# Altium PCB StairLed.PcbDoc
Units mm, origin at the board's own origin, x right, y up, seen from the top; angles counter-clockwise.
Board outline 123.06 x 88.14 mm, 2 copper layers (Top Layer, Bottom Layer); 183 components, 139 nets, 499 pads, 166 vias.
Unrouted connection lines stored in the file: 1.
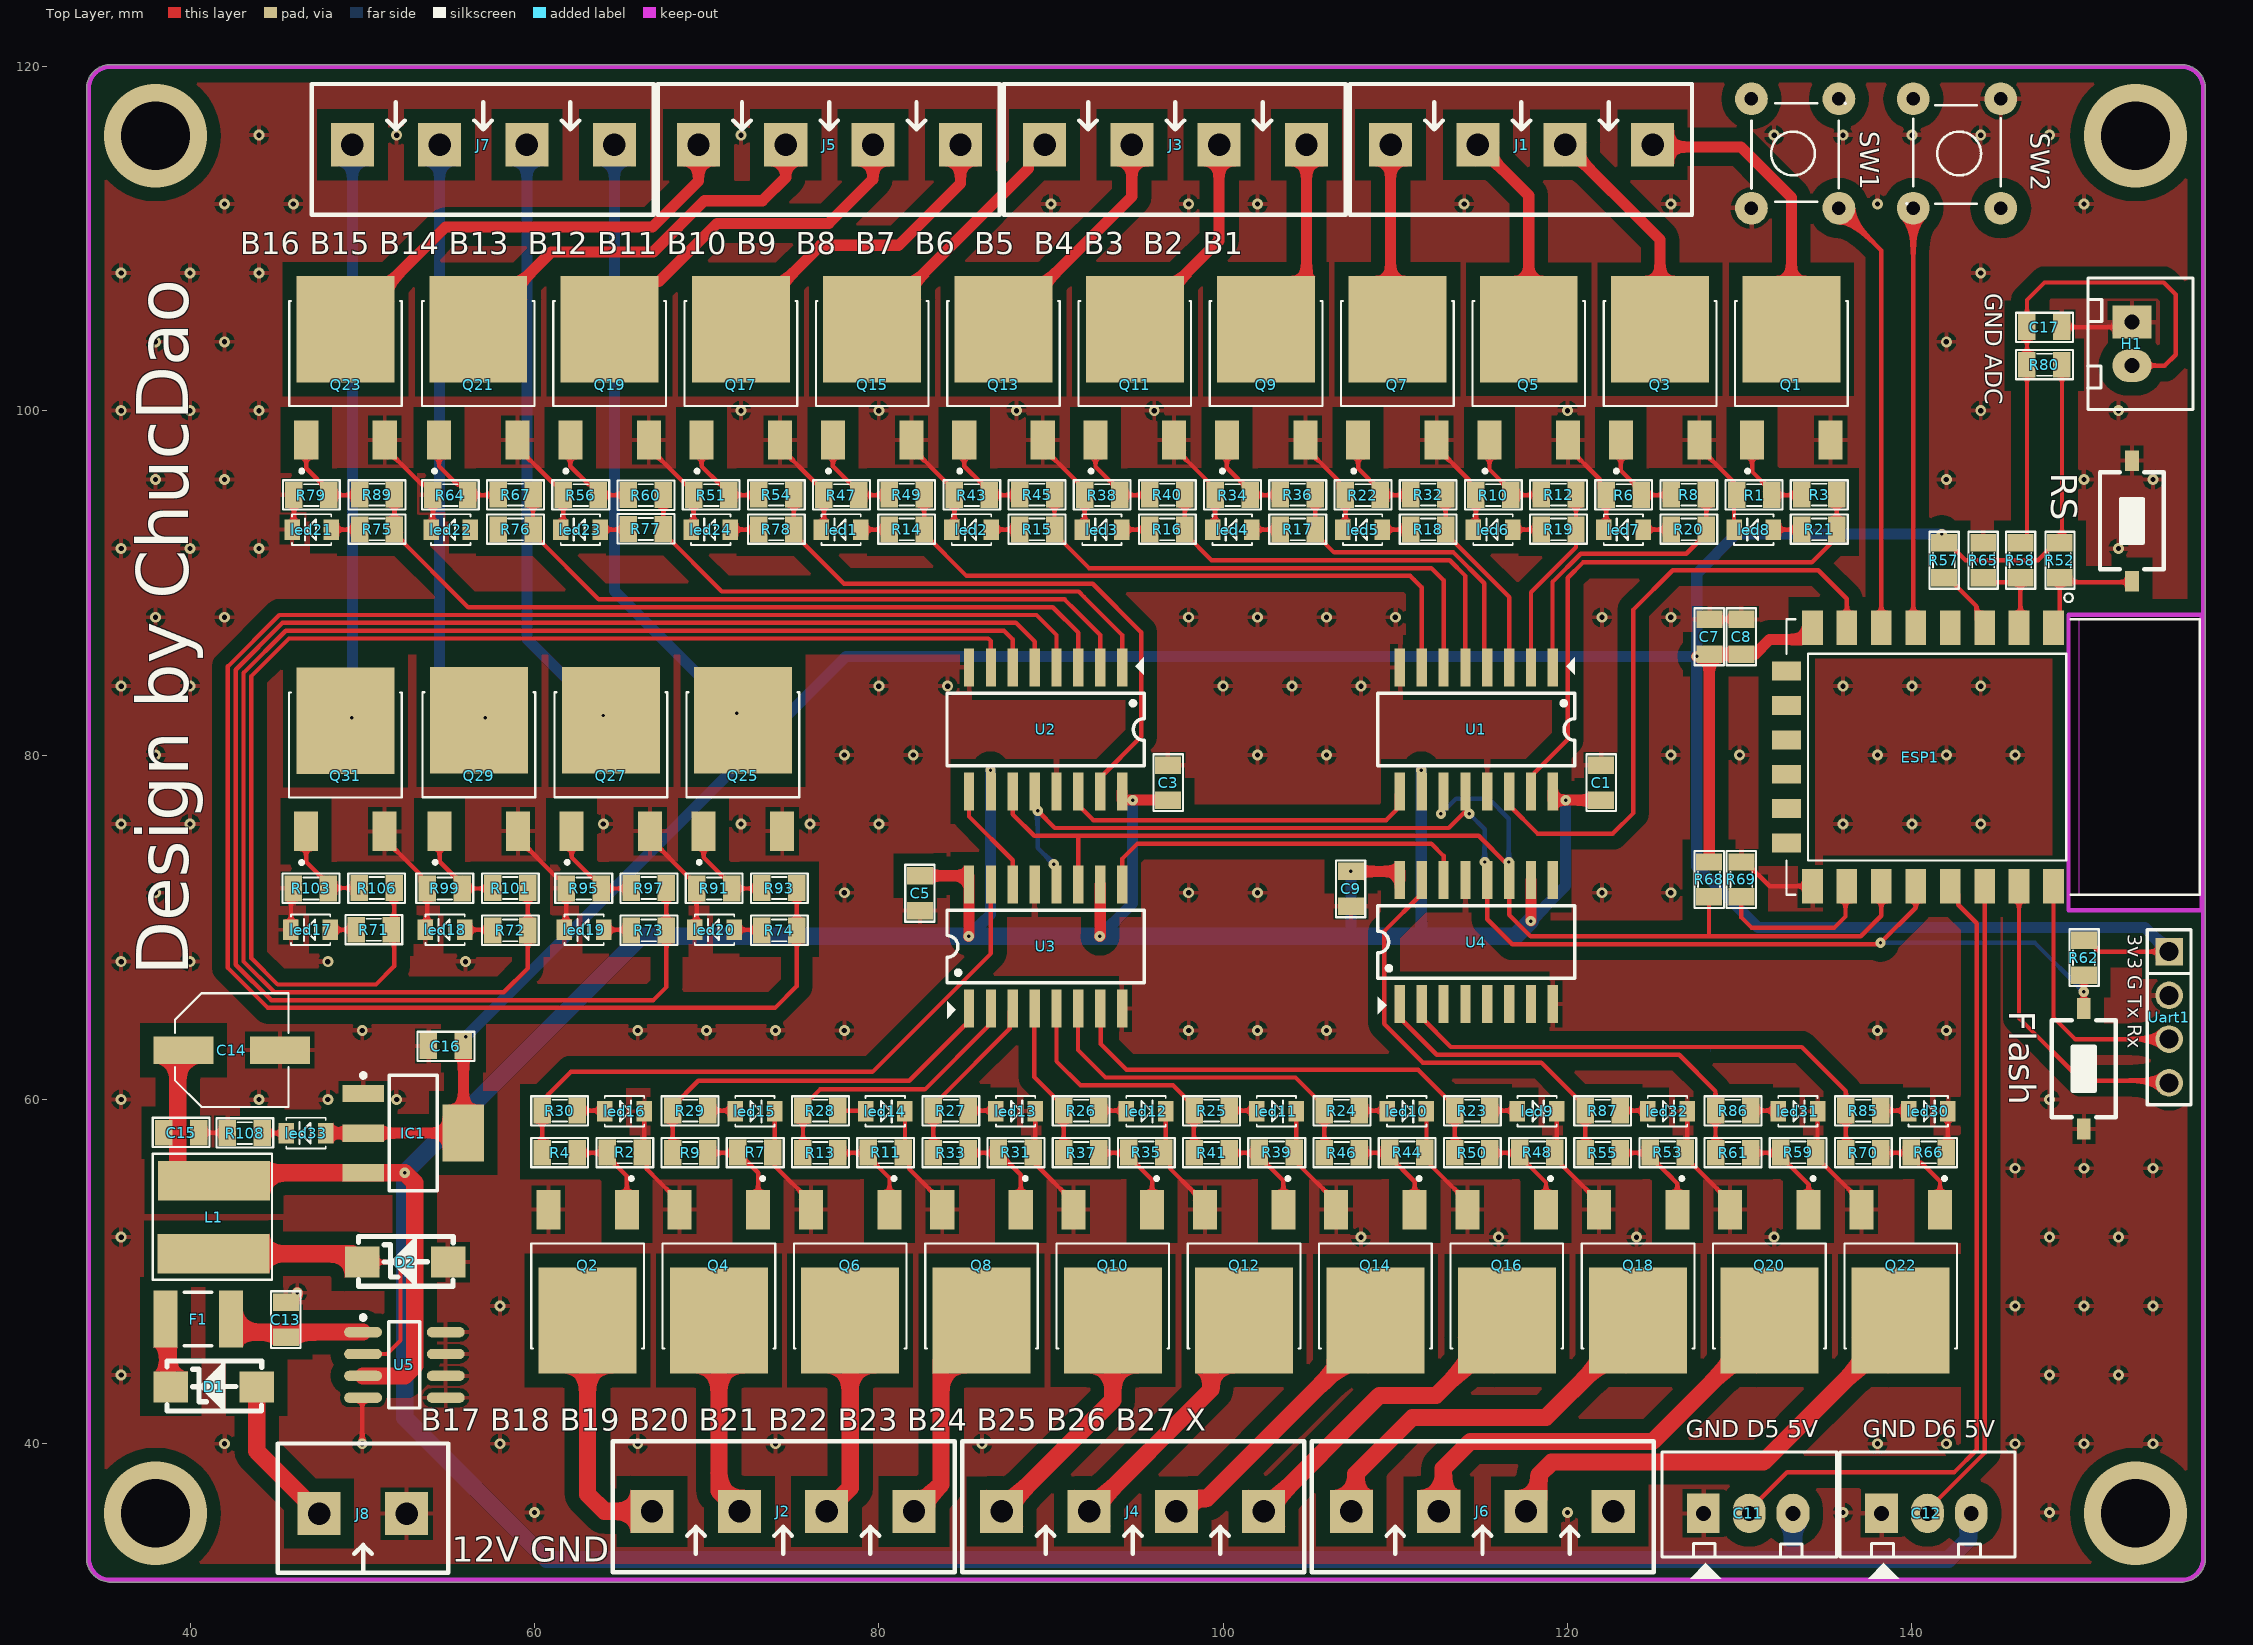
[diagram p0: Top Layer view]
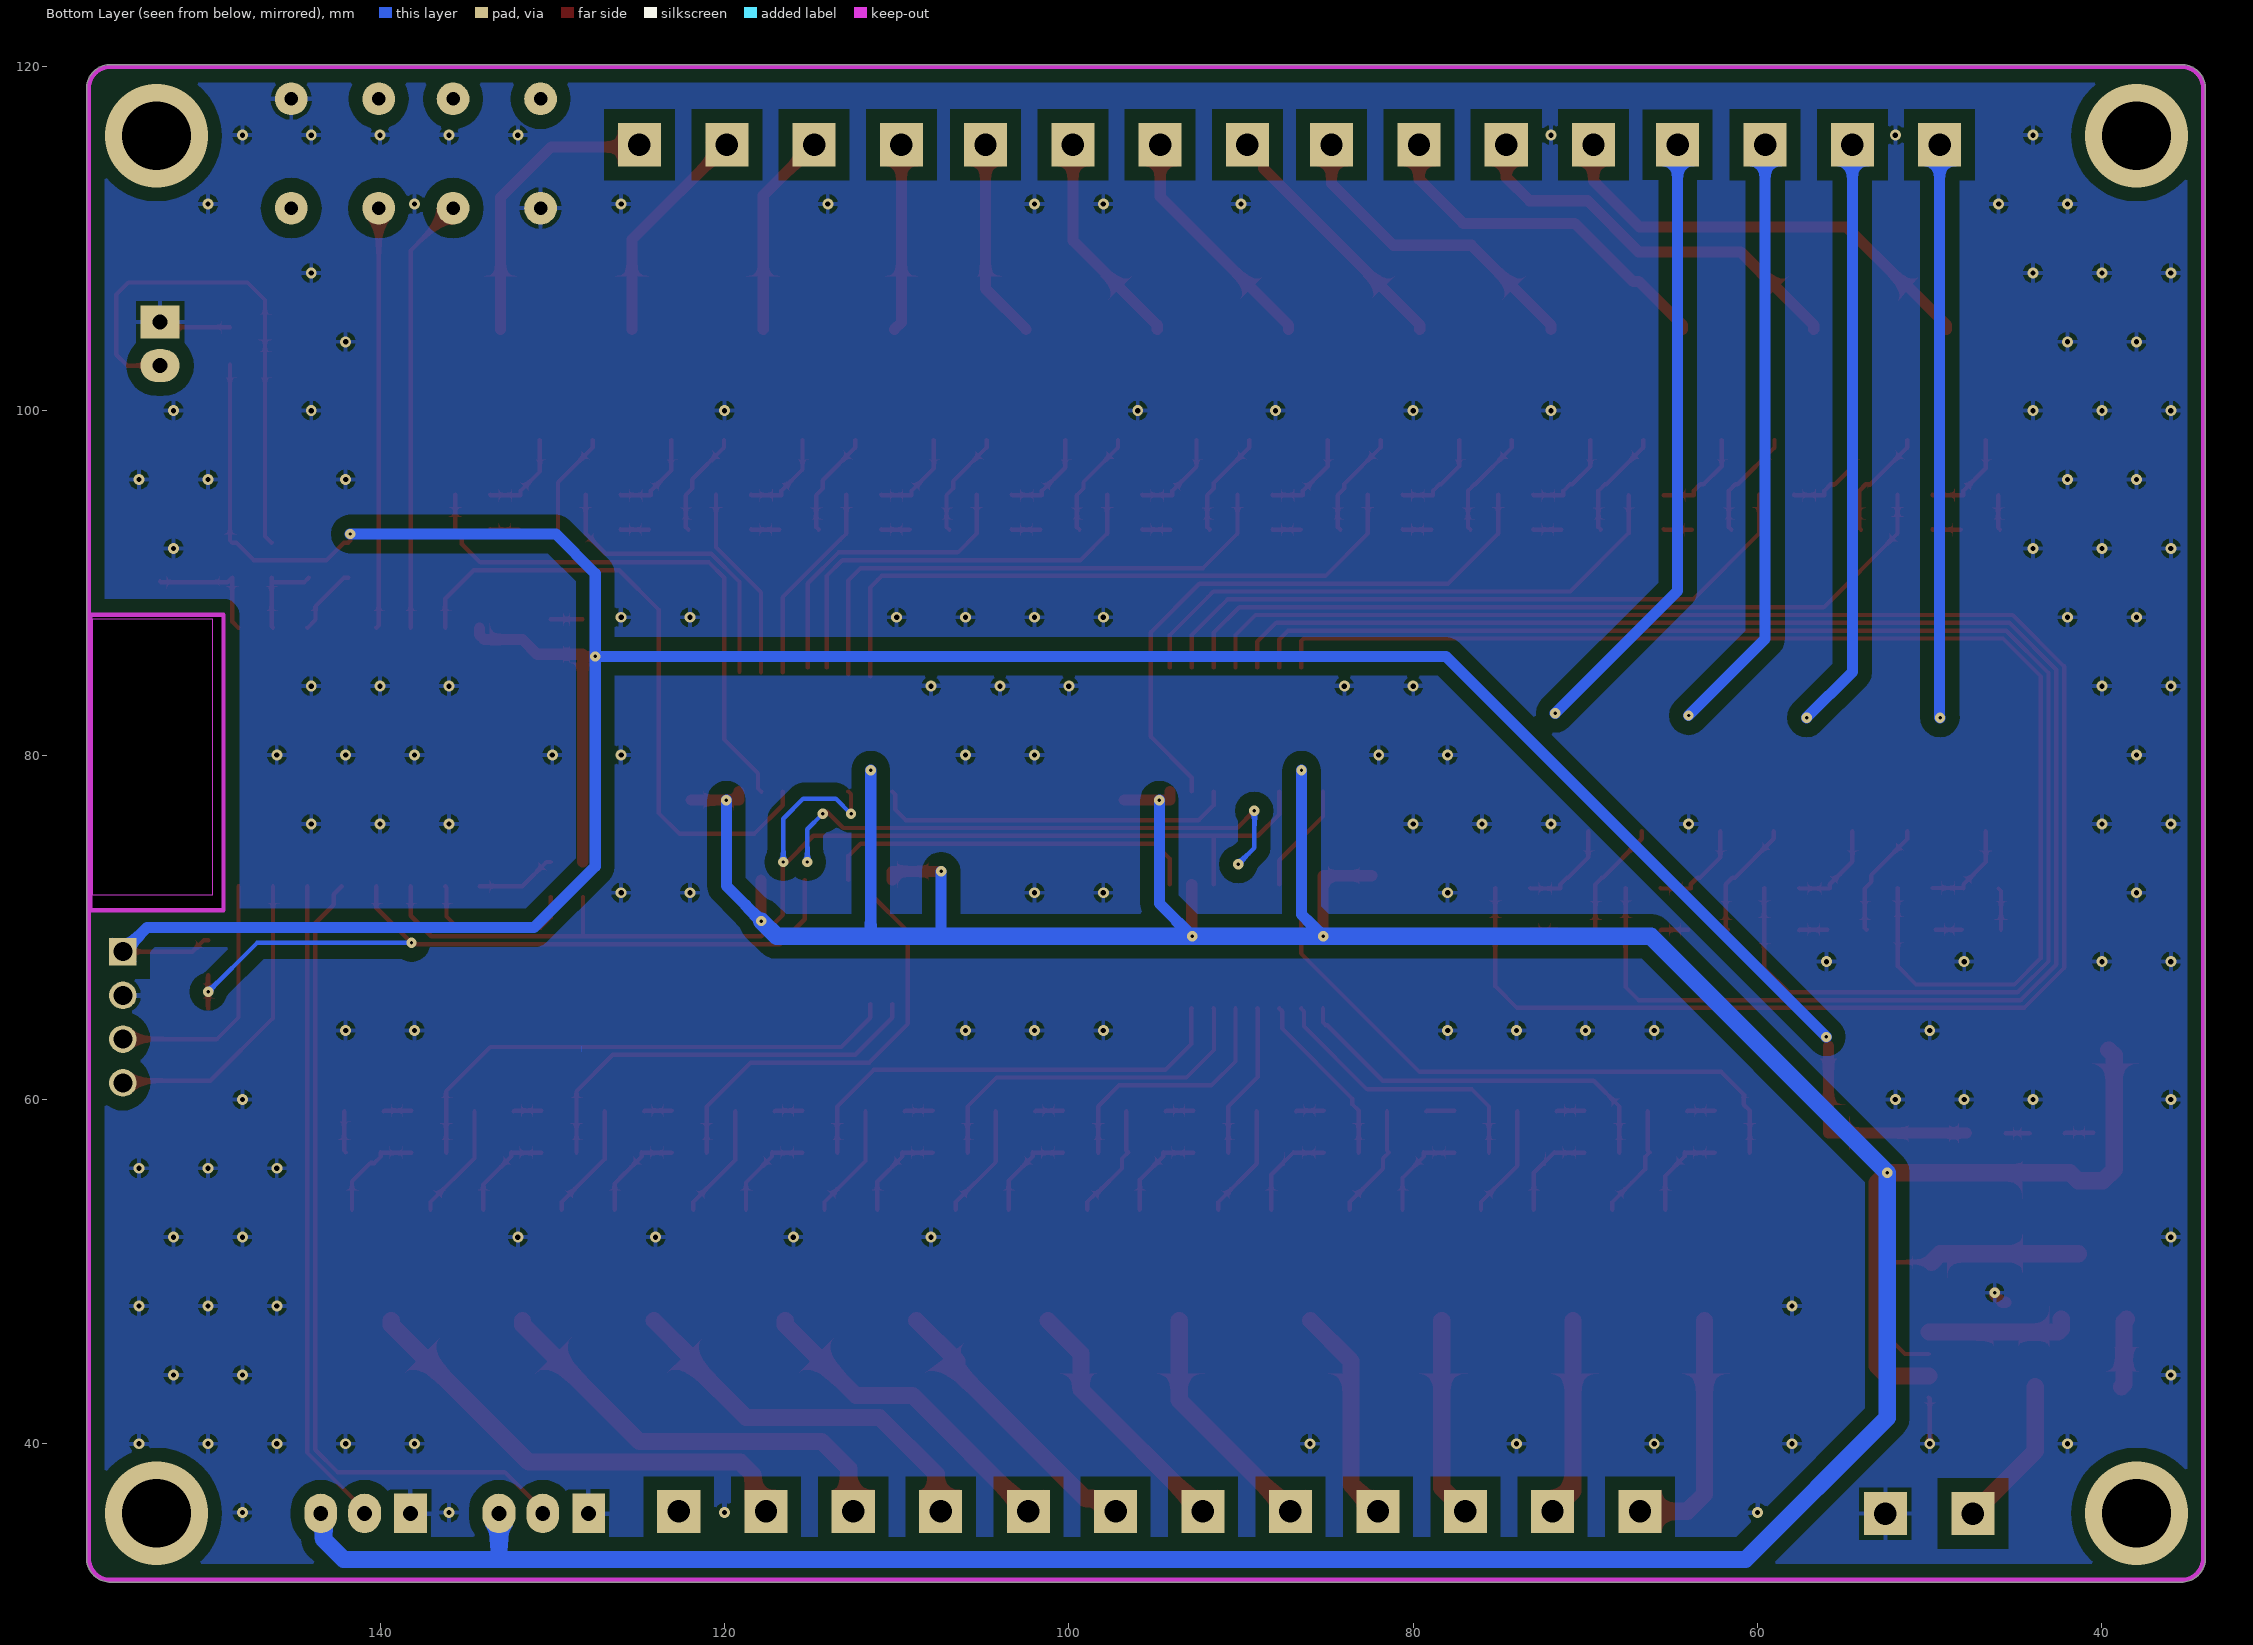
[diagram p1: Bottom Layer view, seen from below]
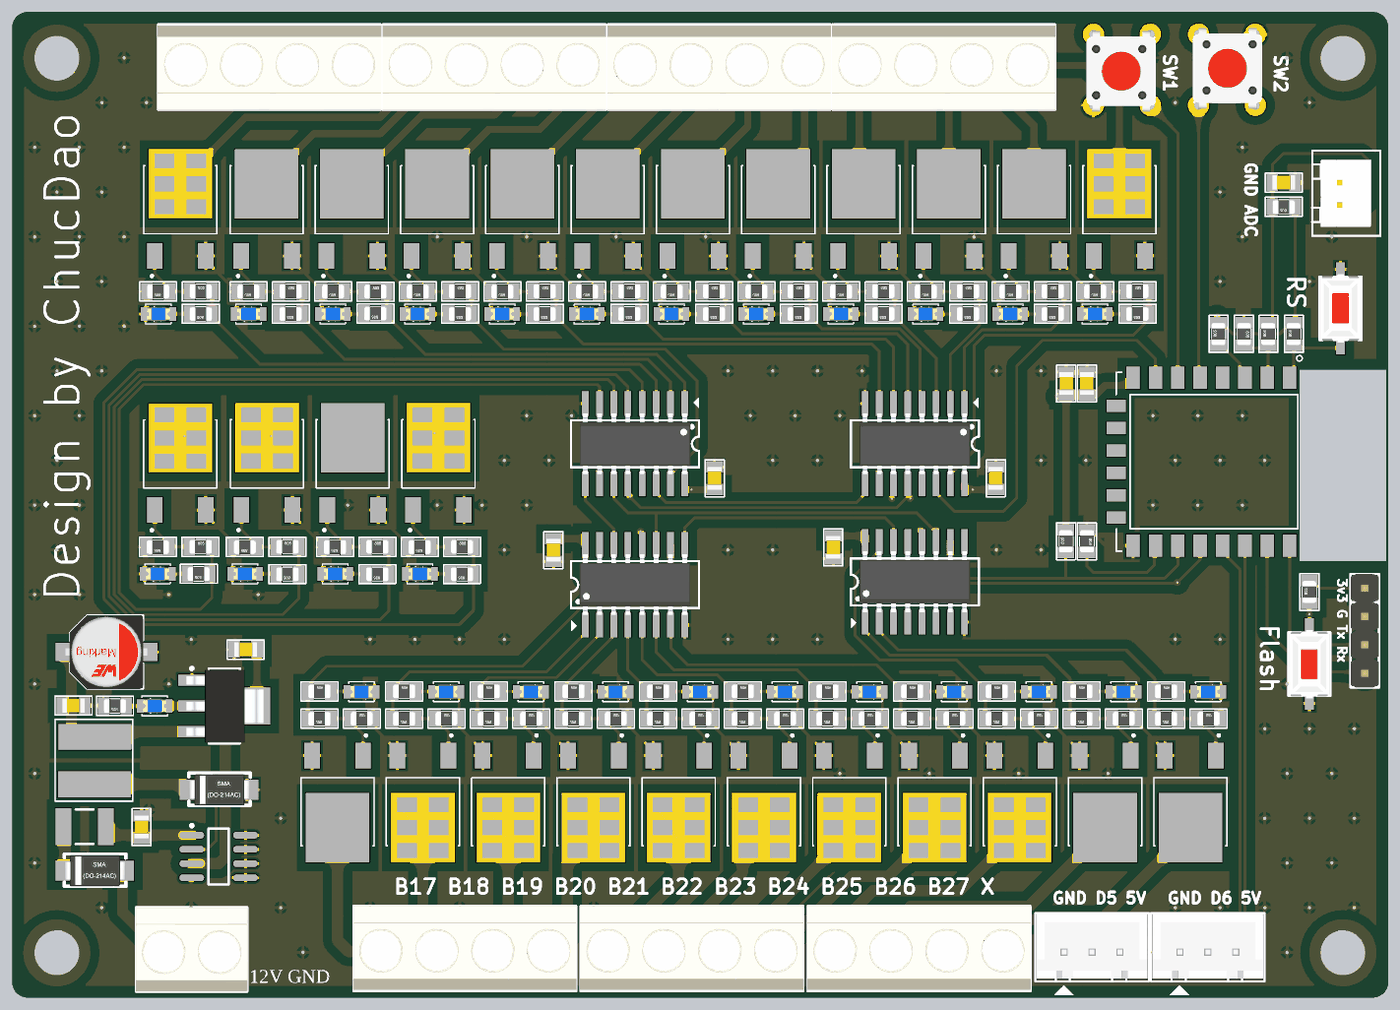
[diagram p2: 3D render of the assembled board from above, using the file's embedded part models]

## Layer stack, top to bottom
Top Solder: solder mask 0.0102, Solder Resist, Dk 3.5
Top Layer: signal copper 0.0356
Dielectric 1: dielectric 0.32, FR-4, Dk 4.8
Bottom Layer: signal copper 0.0356
Bottom Solder: solder mask 0.0102, Solder Resist, Dk 3.5

## Board outline
33.987,33.361 33.987,118.705 cw(c35.385,118.705) 35.385,120.102 155.654,120.102 cw(c155.654,118.705) 157.051,118.705 157.051,33.361 cw(c155.654,33.361) 155.654,31.964 35.385,31.964 cw(c35.385,33.361)
cut-out: 149.098,70.993 156.845,70.993 156.845,88.138 149.098,88.138

## Design rules (kind name [scope] priority, off if disabled: settings)
Clearance [All] p1: gap=0.8 ignorepadtopadclearanceinfootprint=FALSE
PolygonConnect [All] p1: connectstyle=Relief reliefconductorwidth=0.254 reliefentries=4 polygonreliefangle="90 Angle" airgapwidth=0.254
RoomDefinition StairLed [InComponentClass('StairLed')] p1: confinementstyle=ConfineIn formatcopy=TRUE lockcomponents=FALSE outline 0,0 50.8,0 50.8,25.4 0,25.4
RoutingVias [All] p1: holewidth=0.2 width=0.6 viastyle="Through Hole" minholewidth=0.2 minwidth=0.6 maxholewidth=0.2 maxwidth=0.6
SolderMaskExpansion [All] p1: expansion=0.102 istentingtop=FALSE
Width [All] p1: maxlimit=1 minlimit=0.254 preferedwidth=0.65
30 further rules are at their usual default settings.

## Components (designator, comment, footprint, x,y, rotation, side; value= is the part's Value field where it differs from the comment)
C1 "104" Cap-0805 121.92,78.396 r90 top
C3 "104" Cap-0805 96.774,78.396 r90 top
C5 "104" Cap-0805 82.423,71.972 r270 top
C7 "104" Cap-0805 128.27,86.868 r270 top value="22 pF"
C8 "104" Cap-0805 130.125,86.868 r270 top value="22 pF"
C9 "104" Cap-0805 107.442,72.226 r270 top
C11 "Header3" Header3 128.016,35.96 r0 top
C12 "Header3" Header3 138.367,35.96 r0 top
C13 "105" Cap-0805 45.593,47.207 r270 top value="22 pF"
C14 "220/16v" CAP-ALU-SMD-6.3x7.7x2.2 42.418,62.865 r0 top value=1000uF/16V
C15 "106" Cap-0805 39.481,58.039 r180 top value="22 pF"
C16 "104" Cap-0805 54.864,63.119 r0 top value="22 pF"
C17 "104" Cap-0805 147.701,104.877 r0 top
D1 "SS24" DO-214AC-Zenner 43.868,43.307 r180 top value=1N4007
D2 "SS24" DO-214AC-Zenner 54.991,50.546 r180 top value=1N4007
ESP1 "ESP8266-12E/ESP-12E" XCVR_ESP8266-12E/ESP-12E 141.224,79.883 r270 top
F1 "F1A" 1812 40.468,47.244 r180 top value=Fuse
Flash "SW" SW1-SMD 149.987,61.778 r90 top value="SW chip 2 pin"
H1 "Header 2P" "Header 2P-T" 152.908,103.911 r270 top
IC1 "LM1117" SOT223-4N 52.959,58.039 r0 top value=LM317
J1 "KF4" KF4-5.08 124.943,115.443 r180 top
J2 "KF4" KF4-5.08 66.827,36.074 r0 top
J3 "KF4" KF4-5.08 104.843,115.443 r180 top
J4 "KF4" KF4-5.08 87.135,36.074 r0 top
J5 "KF4" KF4-5.08 84.743,115.443 r180 top
J6 "KF4" KF4-5.08 107.442,36.074 r0 top
J7 "KF4" KF4-5.08 64.643,115.443 r180 top
J8 "KF2" KF2-5.08 50.038,35.941 r180 top
L1 "L68uH 2A" 5D28 41.284,53.086 r90 top
led1 "LED SMD" SM-LED-0805-Blue 78.956,93.091 r180 top
led2 "LED SMD" SM-LED-0805-Blue 86.528,93.091 r180 top
led3 "LED SMD" SM-LED-0805-Blue 94.099,93.091 r180 top
led4 "LED SMD" SM-LED-0805-Blue 101.671,93.091 r180 top
led5 "LED SMD" SM-LED-0805-Blue 109.242,93.091 r180 top
led6 "LED SMD" SM-LED-0805-Blue 116.814,93.091 r180 top
led7 "LED SMD" SM-LED-0805-Blue 124.386,93.091 r180 top
led8 "LED SMD" SM-LED-0805-Blue 131.957,93.091 r180 top
led9 "LED SMD" SM-LED-0805-Blue 117.092,59.309 r0 top
led10 "LED SMD" SM-LED-0805-Blue 109.521,59.309 r0 top
led11 "LED SMD" SM-LED-0805-Blue 101.949,59.309 r0 top
led12 "LED SMD" SM-LED-0805-Blue 94.377,59.309 r0 top
led13 "LED SMD" SM-LED-0805-Blue 86.806,59.309 r0 top
led14 "LED SMD" SM-LED-0805-Blue 79.234,59.309 r0 top
led15 "LED SMD" SM-LED-0805-Blue 71.663,59.309 r0 top
led16 "LED SMD" SM-LED-0805-Blue 64.091,59.309 r0 top
led17 "LED SMD" SM-LED-0805-Blue 48.145,69.85 r180 top
led18 "LED SMD" SM-LED-0805-Blue 55.954,69.85 r180 top
led19 "LED SMD" SM-LED-0805-Blue 64.028,69.85 r180 top
led20 "LED SMD" SM-LED-0805-Blue 71.6,69.85 r180 top
led21 "LED SMD" SM-LED-0805-Blue 48.207,93.091 r180 top
led22 "LED SMD" SM-LED-0805-Blue 56.281,93.091 r180 top
led23 "LED SMD" SM-LED-0805-Blue 63.813,93.091 r180 top
led24 "LED SMD" SM-LED-0805-Blue 71.384,93.091 r180 top
led30 "LED SMD" SM-LED-0805-Blue 139.807,59.309 r0 top
led31 "LED SMD" SM-LED-0805-Blue 132.235,59.309 r0 top
led32 "LED SMD" SM-LED-0805-Blue 124.664,59.309 r0 top
led33 "LED SMD" SM-LED-0805-Blue 47.879,58.039 r180 top
Q1 "FDD8870" TRANS_SQD50N03-06P-GE3#1 133.001,102.489 r90 top
Q2 "FDD8870" TRANS_SQD50N03-06P-GE3#2 63.087,49.403 r270 top
Q3 "FDD8870" TRANS_SQD50N03-06P-GE3#2 125.375,102.489 r90 top
Q4 "FDD8870" TRANS_SQD50N03-06P-GE3#1 70.713,49.403 r270 top
Q5 "FDD8870" TRANS_SQD50N03-06P-GE3#2 117.748,102.489 r90 top
Q6 "FDD8870" TRANS_SQD50N03-06P-GE3#1 78.34,49.403 r270 top
Q7 "FDD8870" TRANS_SQD50N03-06P-GE3#2 110.122,102.489 r90 top
Q8 "FDD8870" TRANS_SQD50N03-06P-GE3#1 85.966,49.403 r270 top
Q9 "FDD8870" TRANS_SQD50N03-06P-GE3#2 102.495,102.489 r90 top
Q10 "FDD8870" TRANS_SQD50N03-06P-GE3#1 93.593,49.403 r270 top
Q11 "FDD8870" TRANS_SQD50N03-06P-GE3#2 94.869,102.489 r90 top
Q12 "FDD8870" TRANS_SQD50N03-06P-GE3#1 101.219,49.403 r270 top
Q13 "FDD8870" TRANS_SQD50N03-06P-GE3#2 87.243,102.489 r90 top
Q14 "FDD8870" TRANS_SQD50N03-06P-GE3#1 108.845,49.403 r270 top
Q15 "FDD8870" TRANS_SQD50N03-06P-GE3#2 79.616,102.489 r90 top
Q16 "FDD8870" TRANS_SQD50N03-06P-GE3#1 116.472,49.403 r270 top
Q17 "FDD8870" TRANS_SQD50N03-06P-GE3#2 71.99,102.489 r90 top
Q18 "FDD8870" TRANS_SQD50N03-06P-GE3#1 124.098,49.403 r270 top
Q19 "FDD8870" TRANS_SQD50N03-06P-GE3#2 64.363,102.489 r90 top
Q20 "FDD8870" TRANS_SQD50N03-06P-GE3#2 131.725,49.403 r270 top
Q21 "FDD8870" TRANS_SQD50N03-06P-GE3#2 56.737,102.489 r90 top
Q22 "FDD8870" TRANS_SQD50N03-06P-GE3#2 139.351,49.403 r270 top
Q23 "FDD8870" TRANS_SQD50N03-06P-GE3#1 49.028,102.489 r90 top
Q25 "FDD8870" TRANS_SQD50N03-06P-GE3#1 72.11,79.769 r90 top
Q27 "FDD8870" TRANS_SQD50N03-06P-GE3#2 64.443,79.769 r90 top
Q29 "FDD8870" TRANS_SQD50N03-06P-GE3#1 56.775,79.769 r90 top
Q31 "FDD8870" TRANS_SQD50N03-06P-GE3#1 49.022,79.756 r90 top
R1 "10K" R0805 130.834,95.098 r180 top value=0805
R2 "10K" R0805 65.254,56.921 r0 top value=0805
R3 "10R" R0805 134.62,95.123 r0 top value=0805
R4 "10R" R0805 61.468,56.896 r180 top value=0805
R6 "10K" R0805 123.263,95.098 r180 top value=0805
R7 "10K" R0805 72.825,56.921 r0 top value=0805
R8 "10R" R0805 127.048,95.123 r0 top value=0805
R9 "10R" R0805 69.04,56.896 r180 top value=0805
R10 "10K" R0805 115.691,95.098 r180 top value=0805
R11 "10K" R0805 80.397,56.921 r0 top value=0805
R12 "10R" R0805 119.477,95.123 r0 top value=0805
R13 "10R" R0805 76.611,56.896 r180 top value=0805
R14 "1K" R0805 81.619,93.104 r180 top value=0805
R15 "1K" R0805 89.19,93.104 r180 top value=0805
R16 "1K" R0805 96.762,93.104 r180 top value=0805
R17 "1K" R0805 104.334,93.104 r180 top value=0805
R18 "1K" R0805 111.905,93.104 r180 top value=0805
R19 "1K" R0805 119.477,93.104 r180 top value=0805
R20 "1K" R0805 127.048,93.104 r180 top value=0805
R21 "1K" R0805 134.62,93.104 r180 top value=0805
R22 "10K" R0805 108.119,95.098 r180 top value=0805
R23 "1K" R0805 114.469,59.347 r0 top value=0805
R24 "1K" R0805 106.898,59.347 r0 top value=0805
R25 "1K" R0805 99.326,59.347 r0 top value=0805
R26 "1K" R0805 91.754,59.347 r0 top value=0805
R27 "1K" R0805 84.183,59.347 r0 top value=0805
R28 "1K" R0805 76.611,59.347 r0 top value=0805
R29 "1K" R0805 69.04,59.347 r0 top value=0805
R30 "1K" R0805 61.468,59.347 r0 top value=0805
R31 "10K" R0805 87.969,56.921 r0 top value=0805
R32 "10R" R0805 111.905,95.123 r0 top value=0805
R33 "10R" R0805 84.183,56.896 r180 top value=0805
R34 "10K" R0805 100.548,95.098 r180 top value=0805
R35 "10K" R0805 95.54,56.921 r0 top value=0805
R36 "10R" R0805 104.334,95.123 r0 top value=0805
R37 "10R" R0805 91.754,56.896 r180 top value=0805
R38 "10K" R0805 92.976,95.098 r180 top value=0805
R39 "10K" R0805 103.112,56.921 r0 top value=0805
R40 "10R" R0805 96.762,95.123 r0 top value=0805
R41 "10R" R0805 99.326,56.896 r180 top value=0805
R43 "10K" R0805 85.404,95.098 r180 top value=0805
R44 "10K" R0805 110.684,56.921 r0 top value=0805
R45 "10R" R0805 89.19,95.123 r0 top value=0805
R46 "10R" R0805 106.898,56.896 r180 top value=0805
R47 "10K" R0805 77.833,95.098 r180 top value=0805
R48 "10K" R0805 118.255,56.921 r0 top value=0805
R49 "10R" R0805 81.619,95.123 r0 top value=0805
R50 "10R" R0805 114.469,56.896 r180 top value=0805
R51 "10K" R0805 70.261,95.098 r180 top value=0805
R52 "10K" R0805 148.59,91.313 r90 top value=0805
R53 "10K" R0805 125.827,56.921 r0 top value=0805
R54 "10R" R0805 74.047,95.123 r0 top value=0805
R55 "10R" R0805 122.041,56.896 r180 top value=0805
R56 "10K" R0805 62.69,95.098 r180 top value=0805
R57 "10K" R0805 141.859,91.313 r90 top value=0805
R58 "2K2" R0805 146.304,91.313 r90 top value=0805
R59 "10K" R0805 133.398,56.921 r0 top value=0805
R60 "10R" R0805 66.475,95.098 r0 top value=0805
R61 "10R" R0805 129.613,56.896 r180 top value=0805
R62 "10K" R0805 149.987,68.235 r90 top value=0805
R64 "10K" R0805 55.118,95.098 r180 top value=0805
R65 "1K" R0805 144.145,91.313 r270 top value=0805
R66 "10K" R0805 140.97,56.921 r0 top value=0805
R67 "10R" R0805 58.904,95.123 r0 top value=0805
R68 "10K" R0805 128.219,72.771 r90 top value=0805
R69 "10K" R0805 130.1,72.771 r270 top value=0805
R70 "10R" R0805 137.184,56.896 r180 top value=0805
R71 "1K" R0805 50.673,69.85 r180 top value=0805
R72 "1K" R0805 58.604,69.812 r180 top value=0805
R73 "1K" R0805 66.651,69.812 r180 top value=0805
R74 "1K" R0805 74.222,69.812 r180 top value=0805
R75 "1K" R0805 50.857,93.104 r180 top value=0805
R76 "1K" R0805 58.904,93.104 r180 top value=0805
R77 "1K" R0805 66.475,93.129 r180 top value=0805
R78 "1K" R0805 74.047,93.104 r180 top value=0805
R79 "10K" R0805 47.044,95.098 r180 top value=0805
R80 "2.2K" Res-0805 147.701,102.616 r180 top
R85 "1K" R0805 137.184,59.347 r0 top value=0805
R86 "1K" R0805 129.613,59.347 r0 top value=0805
R87 "1K" R0805 122.041,59.347 r0 top value=0805
R89 "10R" R0805 50.857,95.123 r0 top value=0805
R91 "10K" R0805 70.437,72.25 r180 top value=0805
R93 "10R" R0805 74.222,72.276 r0 top value=0805
R95 "10K" R0805 62.865,72.25 r180 top value=0805
R97 "10R" R0805 66.651,72.276 r0 top value=0805
R99 "10K" R0805 54.791,72.25 r180 top value=0805
R101 "10R" R0805 58.604,72.276 r0 top value=0805
R103 "10K" R0805 47.022,72.25 r180 top value=0805
R106 "10R" R0805 50.835,72.276 r0 top value=0805
R108 "1K" R0805 43.18,58.039 r180 top value=0805
RS "SW" SW1-SMD 152.781,93.599 r270 top value="SW chip 2 pin"
SW1 "SW" SW2-DIP 130.683,111.76 r90 top value="Button chip 4 pin"
SW2 "SW" SW2-DIP 145.161,118.11 r270 top value="Button chip 4 pin"
U1 "74HC595" 74HC595 115.062,81.28 r180 top
U2 "74HC595" 74HC595 90.043,81.28 r180 top
U3 "74HC595" 74HC595 89.332,69.088 r0 top
U4 "74HC595" 74HC595 114.351,69.342 r0 top
U5 "XL1509" SO8_N 52.451,44.577 r0 top
Uart1 "Jump 4p" "Jump 4p" 154.889,64.821 r270 top

## Footprints (in the part's own frame and the unit in brackets; to place one, negate y for a bottom-side part, rotate by r counter-clockwise, add the part's x,y. Pads: shape width x height; smd on the part's side, far side on the other; paste and mask are expansions set on the pad)
5D28 [mm] "5D28"
  rect 2.3x6.5 smd: 1(-2.051,-0.076) 2(2.184,-0.102)
  silkscreen extent -3.56,-3.48 3.76,3.45
74HC595 [mm]
  rect 0.6x2.2 smd: 1(-4.089,-3.803) 2(-2.819,-3.803) 3(-1.549,-3.803) 4(-0.279,-3.803) 5(0.991,-3.803) 6(2.261,-3.803) 7(3.531,-3.803) 8(4.801,-3.803) 9(4.801,3.397) 10(3.531,3.397) 11(2.261,3.397) 12(0.991,3.397) 13(-0.279,3.397) 14(-1.549,3.397) 15(-2.819,3.397) 16(-4.089,3.397)
  silkscreen extent -5.37,-4.39 6.08,1.9, body extent -4.6,-3.2 5.3,2.8, height 1.51
1812 [mm] "Chip Capacitor, Body 4.5x3.2mm, IPC High Density"
  rect 1.4x3.3 smd: 1(-1.9,0) 2(1.9,0)
  silkscreen extent -0.8,-1.55 0.8,1.55, body extent -2.4,-1.7 2.4,1.7, height 1.4
Cap-0805 [mil]
  rect 40x59.06 smd: 1(-40,-1) 2(40,-1)
  silkscreen extent -65,-35 65,32, body extent -40,-26 40,24, height 24
CAP-ALU-SMD-6.3x7.7x2.2 [mm]
  rect 3.5x1.6 smd: 1(-2.8,0) 2(2.8,0)
  silkscreen extent -3.3,-3.3 3.3,3.3, body extent -3.65,-3.3 3.65,3.3, height 7.65
DO-214AC-Zenner [mm]
  rect 2x1.8 smd: 1(0,0) 2(5,0)
  silkscreen extent -0.29,-1.49 5.21,1.4, body extent -0.29,-1.4 5.21,1.4, height 2.6
Header3 [mil] "CON 3"
  rect 75x90 hole 34: 1(-5,0)
  oval 75x90 hole 34: 2(100,0) 3(200,0)
  silkscreen extent -100,-150 300,140, body extent -95,-90 295,136, height 276
"Header 2P-T" [mil]
  rect 75x90 hole 34: 1(-49,-5)
  oval 75x90 hole 34: 2(51,-5)
  silkscreen extent -149,-106 151,135, body extent -117,-75 119,102, height 236
"Jump 4p" [mm]
  rect 1.6x1.6 hole 1.1: 1(-3.759,0.051)
  round 1.6 hole 1.1: 2(-1.219,0.051) 3(1.321,0.051) 4(3.861,0.051)
  silkscreen extent -5.03,-1.22 5.13,1.32, body extent -5.03,-1.22 5.13,1.32, height 8.54
KF2-5.08 [mm]
  rect 2.5x2.5 hole 1.3: 1(-2.54,0) 2(2.54,0)
  silkscreen extent -4.95,-4.08 4.95,3.43, body extent -5,-4.07 5,3.43, height 10
KF4-5.08 [mm]
  rect 2.5x2.5 hole 1.3: 1(0,0) 2(5.08,0) 3(10.147,0) 4(15.215,0)
  silkscreen extent -2.29,-3.53 17.58,4.06, body extent -2.36,-3.43 17.64,4.07, height 10
R0805 [mil] "Chip Resistor, 2x1.2mm"
  rect 40x59.06 smd: 1(-40,0) 2(40,0)
  silkscreen extent -65,-34 65,33, body extent -39,-25 39,25, height 31
Res-0805 [mil]
  rect 40x59.06 smd: 1(-40,-2) 2(40,-2)
  silkscreen extent -65,-36 65,31, body extent -39,-27 39,23, height 31
SM-LED-0805-Blue [mm]
  rect 0.9x1.2 smd: 1(0,0) 2(2.286,0)
  silkscreen extent 0,-0.89 2.29,0.89, body extent 0.13,-0.62 2.15,0.63, height 1.1
SO8_N [mm] "SOIC, 8-Leads, Body 4.9x3.9mm, Pitch 1.27mm, IPC Medium Density"
  oval 2.2x0.6 smd: 1(-2.4,1.905) 2(-2.4,0.635) 3(-2.4,-0.635) 4(-2.4,-1.905) 5(2.4,-1.905) 6(2.4,-0.635) 7(2.4,0.635) 8(2.4,1.905)
  silkscreen extent -2.52,-2.5 0.9,2.88, body extent -1.95,-2.45 1.95,2.45, height 1.75
SOT223-4N [mm] "SOT223, 4-Leads, Body 6.5x3.5mm, Pitch 2.3mm, Lead Span 7mm, IPC Medium Density"
  rect 2.4x1 smd: 1(-2.9,2.3) 2(-2.9,0) 3(-2.9,-2.3)
  rect 2.4x3.3 smd: 4(2.9,0)
  silkscreen extent -3.02,-3.35 1.4,3.47, body extent -3.39,-3.27 3.5,3.23, height 1.72
SW1-SMD [mm]
  rect 1.2x0.8 smd: 1(-3.5,0) 2(3.5,0)
  silkscreen extent -2.82,-1.85 2.82,1.85, body extent -3.05,-1.85 3.05,1.85, height 2.5
SW2-DIP [mil] "SW button 4pin, 250 x250 mil"
  round 75 hole 31: 1(0,0) 2(0,-200) 3(250,-200) 4(250,0)
  silkscreen extent 15,-215 240,0, body extent -36,-220 276,24, height 276
TRANS_SQD50N03-06P-GE3#1 [mil]
  rect 90x55 smd: 1(-165,89.76) 3(-165,-89.76)
  rect 243.31x224.02 smd paste-157.48: 4(88.35,0)
  silkscreen extent -240,-129 152,129
TRANS_SQD50N03-06P-GE3#2 [mil]
  rect 90x55 smd: 1(-165,89.76) 3(-165,-89.76)
  rect 243.31x224.02 smd: 4(88.35,0)
  silkscreen extent -240,-129 152,129
XCVR_ESP8266-12E/ESP-12E [mm]
  rect 2x1.2 smd: 1(-7.5,7) 2(-7.5,5) 3(-7.5,3) 4(-7.5,1) 5(-7.5,-1) 6(-7.5,-3) 7(-7.5,-5) 8(-7.5,-7) 15(7.5,-7) 16(7.5,-5) 17(7.5,-3) 18(7.5,-1) 19(7.5,1) 20(7.5,3) 21(7.5,5) 22(7.5,7)
  rect 1.1x1.7 smd: 9(-5,-8.5) 10(-3,-8.5) 11(-1,-8.5) 12(1,-8.5) 13(3,-8.5) 14(5,-8.5)
  Keep-Out Layer region: 8,8.51 -8.009,8.51 -8.009,15.5 8,15.5
  Keep-Out Layer region: 8,8.51 -8.009,8.51 -8.009,15.5 8,15.5
  silkscreen extent -9.5,-8.5 8,15.5

## Part data
C1 C3 C5 C9 C17: library part Cap-0805
C7 C8 C13 C15 C16: library part Cap, "Capacitor", LatestRevisionDate=17-Jul-2002, LatestRevisionNote="Re-released for DXP Platform.", PackageReference=RAD-0.3, Published=8-Jun-2000, Publisher="Altium Limited", Ðon Giá=200
C11 C12: "Header IDC, 3 x 1 Pin Vertical 2.54mm Pitch (Non-Boxed, Male)", Manufacturer="W¨¹rth Elektronik eiSos GmbH", partNo=613002143121, ComponentLink1 Description=Manufacturer, ComponentLink1URL=http://www.we-online.com, ComponentLink2 Description=Datasheet, ComponentLink2URL=http://katalog.we-online.de/em/datasheet/6130xx143121.pdf, Created by="Karrer Zheng", Created Date="29 March 2013", NoPins=02
C14: library part CP4, "T? Nhôm 330uF 50V 10x10.5MM", Description 1="2200uF-3300uF/6,3V - 1000uF-2200uF/10V", Description 2="1000uF/16V - 470uF => 1000uF/25V - 100uF/100V", Description 3=330uF>470uF/35V_220uF>470uF/50V_10uF>22uF/250V, Description 4="220uF => 330uF/63V - 10uF =>33uF/160 - 200V", Description 5="4,7uF>10uF/250V_3,3uF>10uF/400V - 2,2uF>4,7uF/450V", Ðon Giá=4000
D1 D2: library part D1A, "Diode 1A"
ESP1: "This WiFi module has a 32-bit MCU micro and clock speeds supporting 80 MHz or 160 MHz. Supports the RTOS and integrated Wi-Fi MAC/BB/RF/PA/LNA, and has an on-board antenna.", Package=None, Availability=Unavailable, MF=AI-Thinker, MP=ESP8266-12E/ESP-12E, Price=None, SnapEDA_Link=https://www.snapeda.com/parts/ESP8266-12E/ESP-12E/AI-Thinker/view-part/106414/?ref=snap
F1: library part Fuse, "C?u chì t? ph?c h?i 1812 0.5A 30V MSMD050-30V", Designed by=VanDungEvn, Ðon Giá=3500
Flash RS: library part SW2, "Switch button 2 pin"
IC1: "AMS1117-3.3V SOT223", Ðon Giá=2500
J1 J2 J3 J4 J5 J6 J7: Manufacturer="W¨¹rth Elektronik eiSos GmbH", partNo=691133710004, ComponentLink1 Description=Manufacturer, ComponentLink1 URL=http://www.we-online.com, ComponentLink2 Description=Datasheet, ComponentLink2 URL=http://katalog.we-online.de/em/datasheet/6911337100xx.pdf, Created by="Baojun Chen", Created Date=4-Aug-15, NoPins=4
J8: Manufacturer="Würth Elektronik eiSos GmbH", partNo=691103110002, ComponentLink1 Description=Manufacturer, ComponentLink1URL=http://www.we-online.com, ComponentLink2 Description=Datasheet, ComponentLink2URL=http://katalog.we-online.de/em/datasheet/6911031100xx.pdf, Created by="Karrer Zheng", Created Date="29 October 2013", NoPins=2
L1: library part INDUCTOR, "Cu?n c?m dán CD74 68uH 7.4x7.4x4mm", Ðon Giá=1500
led1 led2 led3 led4 led5 led6 led7 led8 led9 led10 led11 led12 led13 led14 led15 led16 led17 led18 led19 led20 led21 led22 led23 led24 led30 led31 led32 led33: library part LED-SMD-0805
Q1 Q2 Q3 Q4 Q5 Q6 Q7 Q8 Q9 Q10 Q11 Q12 Q13 Q14 Q15 Q16 Q17 Q18 Q19 Q20 Q21 Q22 Q23 Q25 Q27 Q29 Q31: library part SQD50N03-06P-GE3, Package=None, Availability=Unavailable, MP=SQD50N03-06P-GE3, Price=None
R1 R2 R3 R4 R6 R7 R8 R9 R10 R11 R12 R13 R14 R15 R16 R17 R18 R19 R20 R21 R22 R23 R24 R25 R26 R27 R28 R29 R30 R31 R32 R33 R34 R35 R36 R37 R38 R39 R40 R41 R43 R44 R45 R46 R47 R48 R49 R50 R51 R53 R54 R55 R56 R58 R59 R60 R61 R64 R65 R66 R67 R70 R71 R72 R73 R74 R75 R76 R77 R78 R79 R85 R86 R87 R89 R91 R93 R95 R97 R99 R101 R103 R106 R108: library part RES_08, "Tr? 0805 1%", LatestRevisionDate=17-Jul-2002, LatestRevisionNote="Re-released for DXP Platform.", PackageReference=AXIAL-0.4, Published=8-Jun-2000, Publisher="Altium Limited", Ðon Giá=80
R52 R57 R62 R68 R69: library part RES_08, "RES_08", LatestRevisionDate=17-Jul-2002, LatestRevisionNote="Re-released for DXP Platform.", PackageReference=AXIAL-0.4, Published=8-Jun-2000, Publisher="Altium Limited"
R80: library part Res-0805
SW1 SW2: library part SW4, "Switch button 4 pin"
U5: "XL1509-5.0 SOP8 DC-DC 2A 5V"

## Via types
v1: diameter 0.635, hole 0.305, Top Layer to Bottom Layer, tented both sides, 137 vias
v2: diameter 0.6, hole 0.2, Top Layer to Bottom Layer, tented both sides, 25 vias
v3: diameter 6, hole 4, Top Layer to Bottom Layer, tented both sides, 4 vias

## Nets (pads, with @x,y where several pads share a name; then routed paths per layer and width w, separated by ;. In a path a pad name is that pad's centre, name@x,y a point inside that pad or via, vN(x,y) a via of type N, cw(c..) or ccw(c..) an arc to the next point about the centre after c; other vN are vias at no path point)
3.3V: C7.2 C8.2 C16.2 ESP1.8 IC1.2 IC1.4 led33.1 R52.2 R57.2 R62.2 R68.2 R80.1 Uart1.1 | length 198.8
  Top Layer w0.254: v2(141.732,92.837) 141.732,92.456 R57.2 142.101,92.329 143.117,91.313 147.332,91.313 148.348,92.329 R52.2 148.717,92.456 R80.1 ; R62.2 150.229,69.251 150.901,68.58 Uart1.1
  Top Layer w0.65: led33.1 IC1.2 IC1.4 55.88,58.06 C16.2 ; v2(127.508,85.725) 128.118,85.725 C7.2@128.232,85.839 ; R68.2 128.232,73.8 C7.2@128.232,85.839 ; ESP1.8 134.224,86.983 133.949,86.708 131.737,86.708 130.881,85.852 C8.2 C7.2 C7.2@128.232,85.839
  Bottom Layer w0.65: v2(56.007,63.627) 78.105,85.725 v2(127.508,85.725) ; v2(141.732,92.837) 129.794,92.837 127.508,90.551 v2(127.508,85.725) ; Uart1.1 153.546,69.974 131.067,69.974 127.508,73.533 v2(127.508,85.725)
+5V: C1.1 C3.1 C5.1 C9.1 C11.3 C12.3 C14.1 C15.2 IC1.3 L1.2 U1.10 U1.16 U2.10 U2.16 U3.10 U3.16 U4.10 U4.16 U5.3 | length 284.3
  Top Layer w0.254: v2(86.487,79.121) 86.487,77.909 U2.10 ; v2(111.506,79.121) 111.506,77.909 U1.10
  Top Layer w0.65: C5.1 85.217,72.988 85.242,72.963 U3.16 85.242,69.494 v2(85.217,69.469) ; v2(92.837,69.469) 92.862,69.494 U3.10 ; U2.16 94.132,77.405 94.157,77.38 v2(94.742,77.38) C3.1 ; v2(107.417,73.242) 110.236,73.242 110.261,73.217 U4.16 ; v2@117.873,70.375 117.881,70.383 U4.10 ; U1.16 119.151,77.405 119.176,77.38 v2(119.888,77.38) C1.1
  Top Layer w1: C14.1 39.589,62.865 39.289,62.565 39.289,55.92 39.939,55.27 L1.2 41.855,55.739 IC1.3 v2(52.465,55.739) 53.051,55.153 53.051,44.528 52.465,43.942 U5.3
  Bottom Layer w0.65: v2(85.217,69.469) 86.487,70.739 v2(86.487,79.121) ; v2(92.837,69.469) 94.742,71.374 v2(94.742,77.38) ; v2(107.417,73.242) 107.417,69.494 107.442,69.469 ; 111.506,69.469 v2(111.506,79.121) ; v2(117.856,70.358) 119.888,72.39 v2(119.888,77.38)
  Bottom Layer w1: v2(117.856,70.358) 116.967,69.469 111.506,69.469 107.442,69.469 v2(92.837,69.469) v2(85.217,69.469) 66.195,69.469 v2(52.465,55.739) 52.465,41.515 60.706,33.274 133.096,33.274 ; C11.3 133.096,33.274 ; C12.3 143.293,35.806 143.293,34.454 142.113,33.274 133.096,33.274
+12: D1.1 J8.2 | length 8.9
  Top Layer w1: D1.1 43.868,39.571 J8.2
A0: ESP1.2 R58.1 R65.2 | length 5.2
  Top Layer w0.254: R65.2 144.399,90.043 R58.1@146.304,90.043 ; ESP1.2 146.304,87.463 R58.1@146.304,90.043 ; R58.1 R58.1@146.304,90.043
ADC: C17.1 H1.2 R58.2 R80.2 | length 29.9
  Top Layer w0.254: R58.2 146.685,92.71 R80.2 C17.1 146.685,105.093 146.685,106.426 147.701,107.442 153.639,107.442 154.624,107.442 155.321,106.745 155.321,103.251 154.686,102.616 H1.2
CLK: ESP1.17 R68.1 U1.11 U2.11 U3.11 U4.11 | length 72.2
  Top Layer w0.254: U2.11 87.787,77.879 87.787,76.551 89.027,75.311 91.567,75.311 ; U3.11 91.592,75.286 91.567,75.311 ; v2(112.649,76.581) 112.649,77.731 U1.11 ; U4.11@116.475,73.676 114.839,75.311 91.567,75.311 ; U4.11@116.611,73.539 U4.11 116.611,70.714 117.856,69.469 128.143,69.469 ; R68.1 128.219,69.545 128.143,69.469 ; ESP1.17 138.224,70.66 137.033,69.469 128.143,69.469
  Bottom Layer w0.254: v2(112.649,76.581) 113.538,77.47 115.421,77.47 116.586,76.305 v2(116.586,73.787)
D0: ESP1.4
D1: C12.2 ESP1.20 | length 37.8
  Top Layer w0.254: C12.2 140.906,36.15 144.224,39.468 ESP1.20
D2: C11.2 ESP1.19 | length 48.2
  Top Layer w0.254: C11.2 130.556,36.15 132.76,38.354 142.468,38.354 143.77,39.656 143.77,70.225 142.697,71.298 142.697,71.91 ESP1.19
D3: ESP1.18 Flash.2 R62.1 U1.12 U2.12 U3.12 U4.12 | length 77.4
  Top Layer w0.254: v2(89.225,76.764) 90.224,75.765 113.103,75.765 114.046,76.708 114.173,76.708 v2(114.3,76.581) ; U4.12 115.341,70.46 116.786,69.015 138.009,69.015 138.016,69.022 138.11,69.022 140.224,71.136 ESP1.18 ; Flash.2 v2(149.987,66.249) R62.1
  Bottom Layer w0.254: v2(89.225,76.764) 89.225,74.605 v2(90.17,73.66) ; v2(114.3,76.581) 115.189,75.692 v2(115.189,73.787) ; v2(138.176,69.088) 147.148,69.088 v2(149.987,66.249)
D5: ESP1.5 SW2.3 | length 24.4
  Top Layer w0.254: SW2.3 140.081,87.526 ESP1.5
D6: ESP1.6 SW1.2 | length 25.4
  Top Layer w0.254: SW1.2 138.224,109.299 ESP1.6
D7: ESP1.7 U1.14 | length 36.7
  Top Layer w0.254: U1.14 116.611,77.083 118.257,75.438 122.629,75.438 123.825,76.634 123.825,88.446 126.111,90.732 134.566,90.732 136.224,89.074 ESP1.7
D8: ESP1.16 R69.2 | length 9.5
  Top Layer w0.254: R69.2 130.1,70.56 130.683,69.977 134.589,69.977 135.5,69.977 136.144,70.621 136.144,72.303 ESP1.16
EN: ESP1.3 R57.1 | length 4
  Top Layer w0.254: R57.1 142.101,90.297 143.751,88.647 143.751,87.856 ESP1.3
GND: C1.2 C3.2 C5.2 C7.1 C8.1 C9.2 C11.1 C12.1 C13.1 C14.2 C15.1 C16.1 C17.2 D2.1 ESP1.15 Flash.1 H1.1 IC1.1 J8.1 led1.2 led2.2 led3.2 led4.2 led5.2 led6.2 led7.2 led8.2 led9.2 led10.2 led11.2 led12.2 led13.2 led14.2 led15.2 led16.2 led17.2 led18.2 led19.2 led20.2 led21.2 led22.2 led23.2 led24.2 led30.2 led31.2 led32.2 Q1.3 Q2.3 Q3.3 Q4.3 Q5.3 Q6.3 Q7.3 Q8.3 Q9.3 Q10.3 Q11.3 Q12.3 Q13.3 Q14.3 Q15.3 Q16.3 Q17.3 Q18.3 Q19.3 Q20.3 Q21.3 Q22.3 Q23.3 Q25.3 Q27.3 Q29.3 Q31.3 R1.2 R2.2 R6.2 R7.2 R10.2 R11.2 R22.2 R31.2 R34.2 R35.2 R38.2 R39.2 R43.2 R44.2 R47.2 R48.2 R51.2 R53.2 R56.2 R59.2 R64.2 R65.1 R66.2 R69.1 R79.2 R91.2 R95.2 R99.2 R103.2 R108.2 RS.1 SW1.1 SW2.1 U1.8 U1.13 U2.8 U2.13 U3.8 U3.13 U4.8 U4.13 U5.4 U5.5 U5.6 U5.7 U5.8 Uart1.2 | length 180
  Top Layer w0.254: C15.1 42.139,58.064 R108.2 ; led17.2 45.859,72.103 R103.2 ; led21.2 46.028,93.198 R79.2 ; v1(50,40) 50,42.621 U5.4 ; Q31.3 51.302,75.12 53.394,73.028 53.394,72.631 R99.2 53.775,69.957 led18.2 ; Q23.3 51.308,97.853 53.441,95.721 53.721,95.721 54.102,95.34 R64.2 54.102,93.198 led22.2 ; Q21.3 59.017,97.853 61.15,95.721 61.293,95.721 61.674,95.34 R56.2 61.674,93.238 led23.2 ; Q29.3 59.055,75.133 61.315,72.873 61.468,72.873 61.849,72.492 R95.2 61.849,69.957 led19.2 ; led16.2 66.377,57.028 R2.2 66.533,56.658 66.533,55.939 67.272,55.2 68.433,54.038 Q4.3 ; Q19.3 66.643,97.853 68.776,95.721 68.864,95.721 69.245,95.34 R51.2 69.245,93.238 led24.2 ; Q27.3 66.723,75.133 68.983,72.873 69.04,72.873 69.421,72.492 R91.2 69.421,69.957 led20.2 ; led15.2 73.949,56.15 76.06,54.038 Q6.3 ; Q17.3 74.27,97.853 76.403,95.721 76.436,95.721 76.817,95.34 R47.2 76.817,93.238 led1.2 ; led14.2 81.52,57.028 R11.2 81.753,56.582 81.753,55.972 83.686,54.038 Q8.3 ; Q15.3 81.896,97.853 84.007,95.742 84.007,95.479 R43.2 84.388,93.238 led2.2 ; led13.2 89.092,56.259 91.313,54.038 Q10.3 ; Q13.3 89.523,97.853 91.579,95.797 91.579,95.479 R38.2 91.96,93.238 led3.2 ; led12.2 96.663,57.028 R35.2 96.916,56.562 96.916,55.992 98.298,54.61 98.367,54.61 98.939,54.038 Q12.3 ; Q11.3 97.149,97.853 99.151,95.852 99.151,95.479 R34.2 99.532,93.238 led4.2 ; led11.2 104.235,56.369 106.565,54.038 Q14.3 ; Q9.3 104.775,97.853 106.722,95.907 106.722,95.479 R22.2 107.103,93.238 led5.2 ; led10.2 111.807,56.424 114.192,54.038 Q16.3 ; Q7.3 112.402,97.853 114.294,95.961 114.294,95.479 R10.2 114.675,93.238 led6.2 ; led9.2 119.378,56.478 121.818,54.038 Q18.3 ; Q5.3 120.028,97.853 121.866,96.016 121.866,95.479 R6.2 122.247,93.238 led7.2 ; led32.2 126.95,56.533 129.445,54.038 Q20.3 ; Q3.3 127.655,97.853 129.671,95.837 led8.2 ; C7.1 C8.1 ; R69.1 130.342,73.787 131.746,72.383 ESP1.15 ; led31.2 134.521,56.588 137.071,54.038 Q22.3 ; R66.2 142.093,57.028 led30.2 ; C17.2 152.476,104.851 H1.1
  Top Layer w0.65: C13.1 45.81,48.223 46.228,48.641 v2(46.228,48.768)
  other v1: 60,36 120,36 136,36 148,36 42,40 58,40 66,40 74,40 86,40 138,40 142,40 146,40 150,40 154,40 36,44 148,44 152,44 58,48 146,48 150,48 154,48 36,52 108,52 116,52 124,52 132,52 148,52 152,52 146,56 150,56 154,56 36,60 44,60 48,60 52,60 148,60 50,64 66,64 70,64 74,64 78,64 98,64 102,64 106,64 138,64 142,64 36,68 40,68 48,68 56,68 38,72 78,72 98,72 102,72 122,72 126,72 36,76 40,76 64,76 72,76 76,76 80,76 136,76 140,76 144,76 38,80 78,80 82,80 102,80 106,80 126,80 130,80 138,80 142,80 146,80 36,84 40,84 80,84 84,84 100,84 104,84 108,84 136,84 140,84 144,84 38,88 42,88 98,88 102,88 106,88 110,88 122,88 126,88 36,92 40,92 44,92 152,92 38,96 42,96 142,96 150,96 154,96 36,100 40,100 44,100 72,100 80,100 88,100 96,100 120,100 144,100 152,100 38,104 42,104 142,104 36,108 40,108 44,108 144,108 42,112 46,112 90,112 98,112 102,112 114,112 126,112 138,112 150,112 44,116 52,116 72,116 132,116 136,116 140,116 144,116 148,116
NetC13_2: C13.2 F1.1 U5.1 | length 8.3
  Top Layer w1: F1.1 42.368,46.682 42.568,46.482 U5.1
NetD2_2: D2.2 L1.1 U5.2 | length 18
  Top Layer w0.254: D2.2@49.891,50.546 52.075,50.546 52.224,50.397 52.224,46.001 51.435,45.212 U5.2
  Top Layer w1: L1.1 49.402,51.035 D2.2@49.891,50.546
NetJ1_1: J1.1 Q1.4 | length 17
  Top Layer w0.65: J1.1 125.07,115.316 130.065,115.316 133.001,112.38 Q1.4
NetJ1_2: J1.2 Q3.4 | length 13
  Top Layer w0.65: J1.2 125.375,109.931 Q3.4
NetJ1_3: J1.3 Q5.4 | length 11.9
  Top Layer w0.65: J1.3 117.748,112.49 Q5.4
NetJ1_4: J1.4 Q7.4 | length 10.9
  Top Layer w0.65: J1.4 109.728,105.127 Q7.4
NetJ2_1: J2.1 Q2.4 | length 14.2
  Top Layer w1: Q2.4 63.087,37.064 64.077,36.074 J2.1
NetJ2_2: J2.2 Q4.4 | length 11.6
  Top Layer w1: Q4.4 70.713,37.268 J2.2
NetJ2_3: J2.3 Q6.4 | length 11.7
  Top Layer w1: J2.3 78.34,37.439 Q6.4
NetJ2_4: J2.4 Q8.4 | length 12.7
  Top Layer w1: J2.4 83.621,37.653 83.621,44.814 Q8.4
NetJ3_1: J3.1 Q9.4 | length 11.7
  Top Layer w0.65: Q9.4 104.843,107.08 J3.1
NetJ3_2: J3.2 Q11.4 | length 12.7
  Top Layer w0.65: Q11.4 94.869,104.978 99.763,109.872 J3.2
NetJ3_3: J3.3 Q13.4 | length 13.8
  Top Layer w0.65: Q13.4 87.243,104.978 94.695,112.431 J3.3
NetJ3_4: J3.4 Q15.4 | length 14.9
  Top Layer w0.65: Q15.4 79.616,104.978 88.703,114.065 88.703,114.518 J3.4
NetJ4_1: J4.1 Q10.4 | length 13.8
  Top Layer w1: J4.1 93.593,42.532 Q10.4
NetJ4_2: J4.2 Q12.4 | length 14.8
  Top Layer w1: J4.2 99.296,43.155 99.296,45.236 Q12.4
NetJ4_3: J4.3 Q14.4 | length 16.5
  Top Layer w1: J4.3 98.032,36.824 99.054,36.824 106.5,44.27 106.5,44.814 Q14.4
NetJ4_4: J4.4 Q16.4 | length 18.9
  Top Layer w1: J4.4 109.074,42.799 112.357,42.799 116.472,46.914 Q16.4
NetJ5_1: J5.1 Q17.4 | length 18.7
  Top Layer w0.65: Q17.4 71.99,104.978 76.613,109.601 81.153,109.601 84.743,113.191 J5.1
NetJ5_2: J5.2 Q19.4 | length 21
  Top Layer w0.65: Q19.4 64.363,104.978 66.883,107.498 67.229,107.498 70.602,110.871 77.089,110.871 79.663,113.445 J5.2
NetJ5_3: J5.3 Q21.4 | length 23.6
  Top Layer w0.65: Q21.4 56.737,104.978 60.979,109.22 66.9,109.22 69.874,112.194 73.25,112.194 74.596,113.54 J5.3
NetJ5_4: J5.4 Q23.4 | length 26.3
  Top Layer w0.65: Q23.4 49.028,104.978 51.548,107.498 51.657,107.498 54.829,110.67 66.855,110.67 69.528,113.343 J5.4
NetJ6_1: J6.1 Q18.4 | length 22.5
  Top Layer w1: J6.1 107.707,36.339 107.707,38.238 110.998,41.529 118.745,41.529 121.753,44.537 121.753,44.814 Q18.4
NetJ6_2: J6.2 Q20.4 | length 25.2
  Top Layer w1: J6.2 112.788,36.34 112.788,38.561 114.359,40.132 124.943,40.132 131.725,46.914 Q20.4
NetJ6_3: J6.3 Q22.4 | length 27.3
  Top Layer w1: J6.3 118.339,36.824 118.339,38.195 119.077,38.932 131.369,38.932 139.351,46.914 Q22.4
NetJ7_1: J7.1 Q25.4 | length 36
  Bottom Layer w0.65: J7.1 64.643,89.535 v2(71.755,82.423)
NetJ7_2: J7.2 Q27.4 | length 35
  Bottom Layer w0.65: J7.2 59.563,86.741 v2(64.008,82.296)
NetJ7_3: J7.3 Q29.4 | length 34.4
  Bottom Layer w0.65: J7.3 54.496,84.823 v2(57.15,82.169)
NetJ7_4: J7.4 Q31.4 | length 33.3
  Bottom Layer w0.65: v2(49.403,82.169) 49.428,82.194 J7.4
Netled1_1: led1.1 R14.2 | length 1.7
  Top Layer w0.254: led1.1 80.59,93.091 R14.2
Netled2_1: led2.1 R15.2 | length 1.7
  Top Layer w0.254: led2.1 88.162,93.091 R15.2
Netled3_1: led3.1 R16.2 | length 1.7
  Top Layer w0.254: led3.1 95.733,93.091 R16.2
Netled4_1: led4.1 R17.2 | length 1.7
  Top Layer w0.254: led4.1 103.305,93.091 R17.2
Netled5_1: led5.1 R18.2 | length 1.7
  Top Layer w0.254: led5.1 110.876,93.091 R18.2
Netled6_1: led6.1 R19.2 | length 1.7
  Top Layer w0.254: led6.1 118.448,93.091 R19.2
Netled7_1: led7.1 R20.2 | length 1.7
  Top Layer w0.254: led7.1 126.02,93.091 R20.2
Netled8_1: led8.1 R21.2 | length 1.7
  Top Layer w0.254: led8.1 133.591,93.091 R21.2
Netled9_1: led9.1 R23.2 | length 1.6
  Top Layer w0.254: R23.2 117.054,59.347 led9.1
Netled10_1: led10.1 R24.2 | length 1.6
  Top Layer w0.254: R24.2 109.483,59.347 led10.1
Netled11_1: led11.1 R25.2 | length 1.6
  Top Layer w0.254: R25.2 101.911,59.347 led11.1
Netled12_1: led12.1 R26.2 | length 1.6
  Top Layer w0.254: R26.2 94.339,59.347 led12.1
Netled13_1: led13.1 R27.2 | length 1.6
  Top Layer w0.254: R27.2 86.768,59.347 led13.1
Netled14_1: led14.1 R28.2 | length 1.6
  Top Layer w0.254: R28.2 79.196,59.347 led14.1
Netled15_1: led15.1 R29.2 | length 1.6
  Top Layer w0.254: R29.2 71.624,59.347 led15.1
Netled16_1: led16.1 R30.2 | length 1.6
  Top Layer w0.254: R30.2 64.053,59.347 led16.1
Netled17_1: led17.1 R71.2 | length 1.5
  Top Layer w0.254: led17.1 R71.2
Netled18_1: led18.1 R72.2 | length 1.6
  Top Layer w0.254: led18.1 57.55,69.85 R72.2
Netled19_1: led19.1 R73.2 | length 1.6
  Top Layer w0.254: led19.1 65.597,69.85 R73.2
Netled20_1: led20.1 R74.2 | length 1.6
  Top Layer w0.254: led20.1 73.168,69.85 R74.2
Netled21_1: led21.1 R75.2 | length 1.6
  Top Layer w0.254: led21.1 49.829,93.091 R75.2
Netled22_1: led22.1 R76.2
Netled23_1: led23.1 R77.2 | length 1.7
  Top Layer w0.254: led23.1 65.421,93.091 R77.2
Netled24_1: led24.1 R78.2 | length 1.7
  Top Layer w0.254: led24.1 73.018,93.091 R78.2
Netled30_1: led30.1 R85.2 | length 1.6
  Top Layer w0.254: R85.2 139.769,59.347 led30.1
Netled31_1: led31.1 R86.2 | length 1.6
  Top Layer w0.254: R86.2 132.197,59.347 led31.1
Netled32_1: led32.1 R87.2 | length 1.6
  Top Layer w0.254: R87.2 124.626,59.347 led32.1
Netled33_2: led33.2 R108.1 | length 1.4
  Top Layer w0.254: R108.1 led33.2
NetQ1_1: Q1.1 R1.1 R3.1 | length 5.4
  Top Layer w0.254: Q1.1 130.721,96.469 131.85,95.34 R1.1 133.579,95.098 R3.1
NetQ2_1: Q2.1 R2.1 R4.1 | length 5.6
  Top Layer w0.254: R4.1 64.212,56.896 R2.1 64.238,56.679 65.367,55.55 Q2.1
NetQ3_1: Q3.1 R6.1 R8.1 | length 5.5
  Top Layer w0.254: Q3.1 123.095,96.524 124.279,95.34 R6.1 126.007,95.098 R8.1
NetQ4_1: Q4.1 R7.1 R9.1 | length 5.6
  Top Layer w0.254: R9.1 71.784,56.896 R7.1 72.993,55.737 Q4.1
NetQ5_1: Q5.1 R10.1 R12.1 | length 5.5
  Top Layer w0.254: Q5.1 115.468,96.578 116.707,95.34 R10.1 118.435,95.098 R12.1
NetQ6_1: Q6.1 R11.1 R13.1 | length 5.6
  Top Layer w0.254: R13.1 79.356,56.896 R11.1 79.381,56.679 80.62,55.441 Q6.1
NetQ7_1: Q7.1 R22.1 R32.1 | length 5.5
  Top Layer w0.254: Q7.1 107.842,96.633 109.135,95.34 R22.1 110.864,95.098 R32.1
NetQ8_1: Q8.1 R31.1 R33.1 | length 5.6
  Top Layer w0.254: R33.1 86.927,56.896 R31.1 88.246,55.628 Q8.1
NetQ9_1: Q9.1 R34.1 R36.1 | length 5.5
  Top Layer w0.254: Q9.1 100.215,96.688 101.564,95.34 R34.1 103.292,95.098 R36.1
NetQ10_1: Q10.1 R35.1 R37.1 | length 5.7
  Top Layer w0.254: R37.1 94.499,56.896 R35.1 94.524,56.679 95.873,55.331 Q10.1
NetQ11_1: Q11.1 R38.1 R40.1 | length 5.5
  Top Layer w0.254: Q11.1 92.589,96.743 93.992,95.34 R38.1 95.72,95.098 R40.1
NetQ12_1: Q12.1 R39.1 R41.1 | length 5.7
  Top Layer w0.254: R41.1 102.07,56.896 R39.1 102.096,56.679 103.499,55.276 Q12.1
NetQ13_1: Q13.1 R43.1 R45.1 | length 5.6
  Top Layer w0.254: Q13.1 84.963,96.774 86.016,95.721 86.039,95.721 86.42,95.34 R43.1 88.149,95.098 R45.1
NetQ14_1: Q14.1 R44.1 R46.1 | length 5.7
  Top Layer w0.254: R46.1 109.642,56.896 R44.1 109.668,56.679 111.125,55.221 Q14.1
NetQ15_1: Q15.1 R47.1 R49.1 | length 5.6
  Top Layer w0.254: Q15.1 77.336,96.774 78.39,95.721 78.468,95.721 78.849,95.34 R47.1 80.577,95.098 R49.1
NetQ16_1: Q16.1 R48.1 R50.1 | length 5.7
  Top Layer w0.254: R50.1 117.214,56.896 R48.1 117.239,56.679 118.752,55.167 Q16.1
NetQ17_1: Q17.1 R51.1 R54.1 | length 5.7
  Top Layer w0.254: Q17.1 69.71,96.774 70.763,95.721 70.896,95.721 71.277,95.34 R51.1 73.006,95.098 R54.1
NetQ18_1: Q18.1 R53.1 R55.1 | length 5.7
  Top Layer w0.254: R55.1 124.785,56.896 R53.1 124.811,56.679 125.782,55.708 125.788,55.708 126.378,55.118 Q18.1
NetQ19_1: Q19.1 R56.1 R60.1 | length 5.7
  Top Layer w0.254: Q19.1 62.083,96.774 63.137,95.721 63.325,95.721 63.706,95.34 R56.1 R60.1
NetQ20_1: Q20.1 R59.1 R61.1 | length 5.8
  Top Layer w0.254: R61.1 132.357,56.896 R59.1 132.382,56.679 134.005,55.057 Q20.1
NetQ21_1: Q21.1 R64.1 R67.1 | length 5.8
  Top Layer w0.254: Q21.1 54.457,96.775 55.511,95.721 55.753,95.721 56.134,95.34 R64.1 57.862,95.098 R67.1
NetQ22_1: Q22.1 R66.1 R70.1 | length 5.9
  Top Layer w0.254: R70.1 139.929,56.896 R66.1 139.954,56.679 140.335,56.298 140.577,56.298 141.631,55.244 Q22.1
NetQ23_1: Q23.1 R79.1 R89.1 | length 5.5
  Top Layer w0.254: Q23.1 46.748,96.652 48.06,95.34 R79.1 49.816,95.098 R89.1
NetQ25_1: Q25.1 R91.1 R93.1 | length 5.8
  Top Layer w0.254: Q25.1 69.83,74.054 71.011,72.873 71.072,72.873 71.453,72.492 R91.1 73.181,72.25 R93.1
NetQ27_1: Q27.1 R95.1 R97.1 | length 5.9
  Top Layer w0.254: Q27.1 62.163,74.054 63.343,72.873 63.5,72.873 63.881,72.492 R95.1 65.609,72.25 R97.1
NetQ29_1: Q29.1 R99.1 R101.1 | length 5.7
  Top Layer w0.254: Q29.1 54.495,73.805 55.807,72.492 R99.1 57.563,72.25 R101.1
NetQ31_1: Q31.1 R103.1 R106.1 | length 5.6
  Top Layer w0.254: Q31.1 46.742,73.788 48.038,72.492 R103.1 48.063,72.276 R106.1
NetU1_9: U1.9 U2.14 | length 21
  Top Layer w0.254: U2.14 91.592,77.083 92.457,76.219 109.471,76.219 110.088,76.837 110.088,77.71 U1.9
NetU2_9: U2.9 U3.14 | length 6.5
  Top Layer w0.254: U2.9 85.242,76.429 87.782,73.889 U3.14
NetU3_9: U3.9 U4.14 | length 22.2
  Top Layer w0.254: U3.9 94.132,73.966 95.024,74.857 112.087,74.857 112.801,74.143 U4.14
O0_HC: R3.2 R21.1 U1.15 | length 32.4
  Top Layer w0.254: U1.15@117.856,77.858 118.054,78.056 118.054,78.938 120.015,80.899 120.015,90.3 120.901,91.186 134.183,91.186 135.255,92.258 135.255,92.723 R21.1 R3.2
O1_HC: R8.2 R20.1 U1.1 | length 17.6
  Top Layer w0.254: U1.1@119.126,84.836 119.126,90.053 120.767,91.694 126.897,91.694 128.064,92.862 R8.2
O2_HC: R12.2 R19.1 U1.2 | length 11.4
  Top Layer w0.254: U1.2@117.881,84.798 117.881,89.45 120.493,92.061 R19.1 R12.2
O3_HC: R18.1 R32.2 U1.3 | length 11.9
  Top Layer w0.254: R32.2 112.921,92.862 113.302,92.481 116.611,89.171 U1.3@116.611,84.798
O4_HC: R17.1 R36.2 U1.4 | length 18.2
  Top Layer w0.254: R36.2 R17.1 105.35,92.862 106.444,91.767 113.374,91.767 115.168,89.972 U1.4@115.168,85.083
O5_HC: R16.1 R40.2 U1.5 | length 24.9
  Top Layer w0.254: R40.2 R16.1 97.778,92.862 99.327,91.313 113.157,91.313 114.071,90.399 U1.5
O6_HC: R15.1 R45.2 U1.6 | length 31.4
  Top Layer w0.254: R45.2 R15.1 90.206,92.862 92.212,90.855 112.091,90.855 112.801,90.145 U1.6@112.801,84.684
O7_HC: R14.1 R49.2 U1.7 | length 37.6
  Top Layer w0.254: R49.2 R14.1 82.635,92.862 85.095,90.401 110.872,90.401 111.105,90.169 111.105,90.162 111.531,89.735 U1.7@111.531,84.571
O8_HC: R54.2 R78.1 U2.15 | length 35.1
  Top Layer w0.254: R54.2 75.063,92.862 77.977,89.947 92.425,89.947 95.25,87.122 95.25,81.071 92.862,78.683 U2.15
O9_HC: R60.2 R77.1 U2.1 | length 33.2
  Top Layer w0.254: R60.2 R77.1 67.491,92.887 70.885,89.493 91.609,89.493 91.948,89.154 94.132,86.97 U2.1
O10_HC: R67.2 R76.1 U2.2 | length 39.5
  Top Layer w0.254: R67.2 59.92,92.862 63.742,89.039 90.793,89.039 91.44,88.392 92.862,86.97 U2.2
O11_HC: R75.1 R89.2 U2.3 | length 46.4
  Top Layer w0.254: R89.2 51.873,92.862 56.149,88.585 90.104,88.585 91.592,87.097 U2.3
O12_HC: R74.1 R93.2 U2.4 | length 109.5
  Top Layer w0.254: R93.2 R74.1 75.238,66.581 73.97,65.313 44.521,65.313 42.199,67.635 42.199,85.146 45.184,88.131 89.161,88.131 90.322,86.97 U2.4
O13_HC: R73.1 R97.2 U2.5 | length 98.5
  Top Layer w0.254: R97.2 R73.1 67.667,66.524 66.91,65.767 44.709,65.767 42.653,67.823 42.653,84.958 45.372,87.677 87.964,87.677 89.052,86.589 U2.5
O14_HC: R72.1 R101.2 U2.6 | length 86.8
  Top Layer w0.254: R101.2 R72.1 59.62,67.621 58.22,66.221 44.897,66.221 43.107,68.011 43.107,84.77 45.56,87.223 87.275,87.223 87.782,86.716 U2.6
O15_HC: R71.1 R106.2 U2.7 | length 75.7
  Top Layer w0.254: R106.2 51.851,67.726 50.8,66.675 45.085,66.675 43.561,68.199 43.561,84.582 45.748,86.769 86.364,86.769 86.512,86.621 U2.7
O16_HC: R4.2 R30.1 U3.15 | length 36.6
  Top Layer w0.254: R4.2 R30.1 60.798,59.693 60.798,60.29 62.103,61.595 79.629,61.595 86.512,68.478 U3.15
O17_HC: R9.2 R29.1 U3.1 | length 22.7
  Top Layer w0.254: R9.2 68.024,59.589 69.521,61.087 81.766,61.087 84.991,64.312 85.069,64.312 85.242,64.485 U3.1
O18_HC: R13.2 R28.1 U3.2 | length 16.5
  Top Layer w0.254: R13.2 75.595,59.589 76.585,60.579 82.677,60.579 86.339,64.241 86.339,65.112 U3.2
O19_HC: R27.1 R33.2 U3.3 | length 10.3
  Top Layer w0.254: R33.2 R27.1 83.548,59.728 83.548,60.053 87.609,64.114 87.609,65.112 U3.3
O20_HC: R26.1 R37.2 U3.4 | length 9.1
  Top Layer w0.254: U3.4 89.027,65.259 89.027,61.301 90.738,59.589 R37.2
O21_HC: R25.1 R41.2 U3.5 | length 14.8
  Top Layer w0.254: U3.5 90.322,62.205 91.713,60.814 97.085,60.814 98.298,59.601 98.298,56.908 R41.2
O22_HC: R24.1 R46.2 U3.6 | length 20.8
  Top Layer w0.254: U3.6 91.567,65.259 91.567,62.865 93.164,61.268 104.203,61.268 105.882,59.589 R46.2
O23_HC: R23.1 R50.2 U3.7 | length 26.8
  Top Layer w0.254: U3.7 92.892,65.255 92.892,63.219 94.39,61.722 111.32,61.722 113.453,59.589 R50.2
O24_HC: R55.2 R87.1 U4.15 | length 25.6
  Top Layer w0.254: U4.15 111.531,71.939 109.347,69.754 109.347,64.389 111.599,62.137 118.477,62.137 121.031,59.583 121.031,56.902 R55.2
O25_HC: R61.2 R86.1 U4.1 | length 24.5
  Top Layer w0.254: U4.1 110.261,64.739 112.409,62.591 126.484,62.591 128.597,60.478 R61.2
O26_HC: R70.2 R85.1 U4.2 | length 30.8
  Top Layer w0.254: U4.2 111.531,64.739 113.225,63.045 133.602,63.045 136.168,60.478 R70.2
O27_HC: U4.3
O28_HC: U4.4
O29_HC: U4.5
O30_HC: U4.6
O31_HC: U4.7
RS: ESP1.1 R52.1 RS.2 | length 7.4
  Top Layer w0.254: ESP1.1 148.59,87.749 R52.1 148.844,90.043 152.725,90.043 RS.2
RX: ESP1.21 Uart1.4 | length 17.9
  Top Layer w0.254: ESP1.21 146.224,64.723 149.86,61.087 154.813,61.087 Uart1.4
TX: ESP1.22 Uart1.3 | length 14.9
  Top Layer w0.254: ESP1.22 148.224,64.755 149.479,63.5 Uart1.3
Vin: D1.2 F1.2 | length 4.1
  Top Layer w1: F1.2 38.718,47.094 38.718,43.457 D1.2
pads on no net: ESP1.9 ESP1.10 ESP1.11 ESP1.12 ESP1.13 ESP1.14 J6.4 SW1.3 SW1.4 SW2.2 SW2.4 U4.9
copper on no net:
  other v3: 37.988,35.964 152.988,35.964 37.988,115.964 152.988,115.964

## Polygon pours and split planes (outlines as drawn)
GND on Bottom Layer "GND_L02_P001" (solid, pour order 1): 34.163,120.142 156.591,120.142 156.845,119.888 156.845,32.258 34.163,32.258
GND on Top Layer "GND_L01_P000" (solid, pour order 0): 34.544,120.015 34.671,119.888 156.591,119.888 156.591,32.131 156.464,32.004 156.21,32.258 34.163,32.258

## Keep-outs
Keep-Out Layer:
  lines w0.254: 35.385,119.975 ccw(c35.385,118.705) 34.115,118.705 34.115,117.562 34.115,33.361 ccw(c35.385,33.361) 35.385,32.091 43.386,32.091 ; 35.433,119.975 155.654,119.975 cw(c155.654,118.705) 156.924,118.705 156.924,33.361 cw(c155.654,33.361) 155.654,32.091 147.78,32.091 41.227,32.091 ; 149.098,70.993 149.098,88.138 156.845,88.138 156.845,70.993 149.098,70.993

## Silkscreen, mask and mechanical layers (free items; w line width, h text height)
Top Overlay:
  text "B16 B15 B14 B13  B12 B11 B10 B9  B8  B7  B6  B5  B4 B3  B2  B1" at 42.926,109.093 h1.3
  text "GND ADC" at 144.272,106.807 h1 r270
  text "3v3 G Tx Rx" at 152.527,69.596 h0.8 r270
  text "Design by ChucDao" at 39.894,67.183 h3 r90
  text "B17 B18 B19 B20 B21 B22 B23 B24 B25 B26 B27 X" at 53.404,40.767 h1.3
  text "GND D5 5V" at 126.873,40.386 h1
  text "GND D6 5V" at 137.16,40.386 h1
  text "12V GND" at 55.196,32.654 h2.5